# Altium PCB CoreEP4CE10-PCB1.PcbDoc
Units mil, origin at the board's own origin, x right, y up, seen from the top; angles counter-clockwise.
Board outline 6000 x 4000 mil, 2 copper layers (Top Layer, Bottom Layer); 5 components, 0 nets, 182 pads, 0 vias.
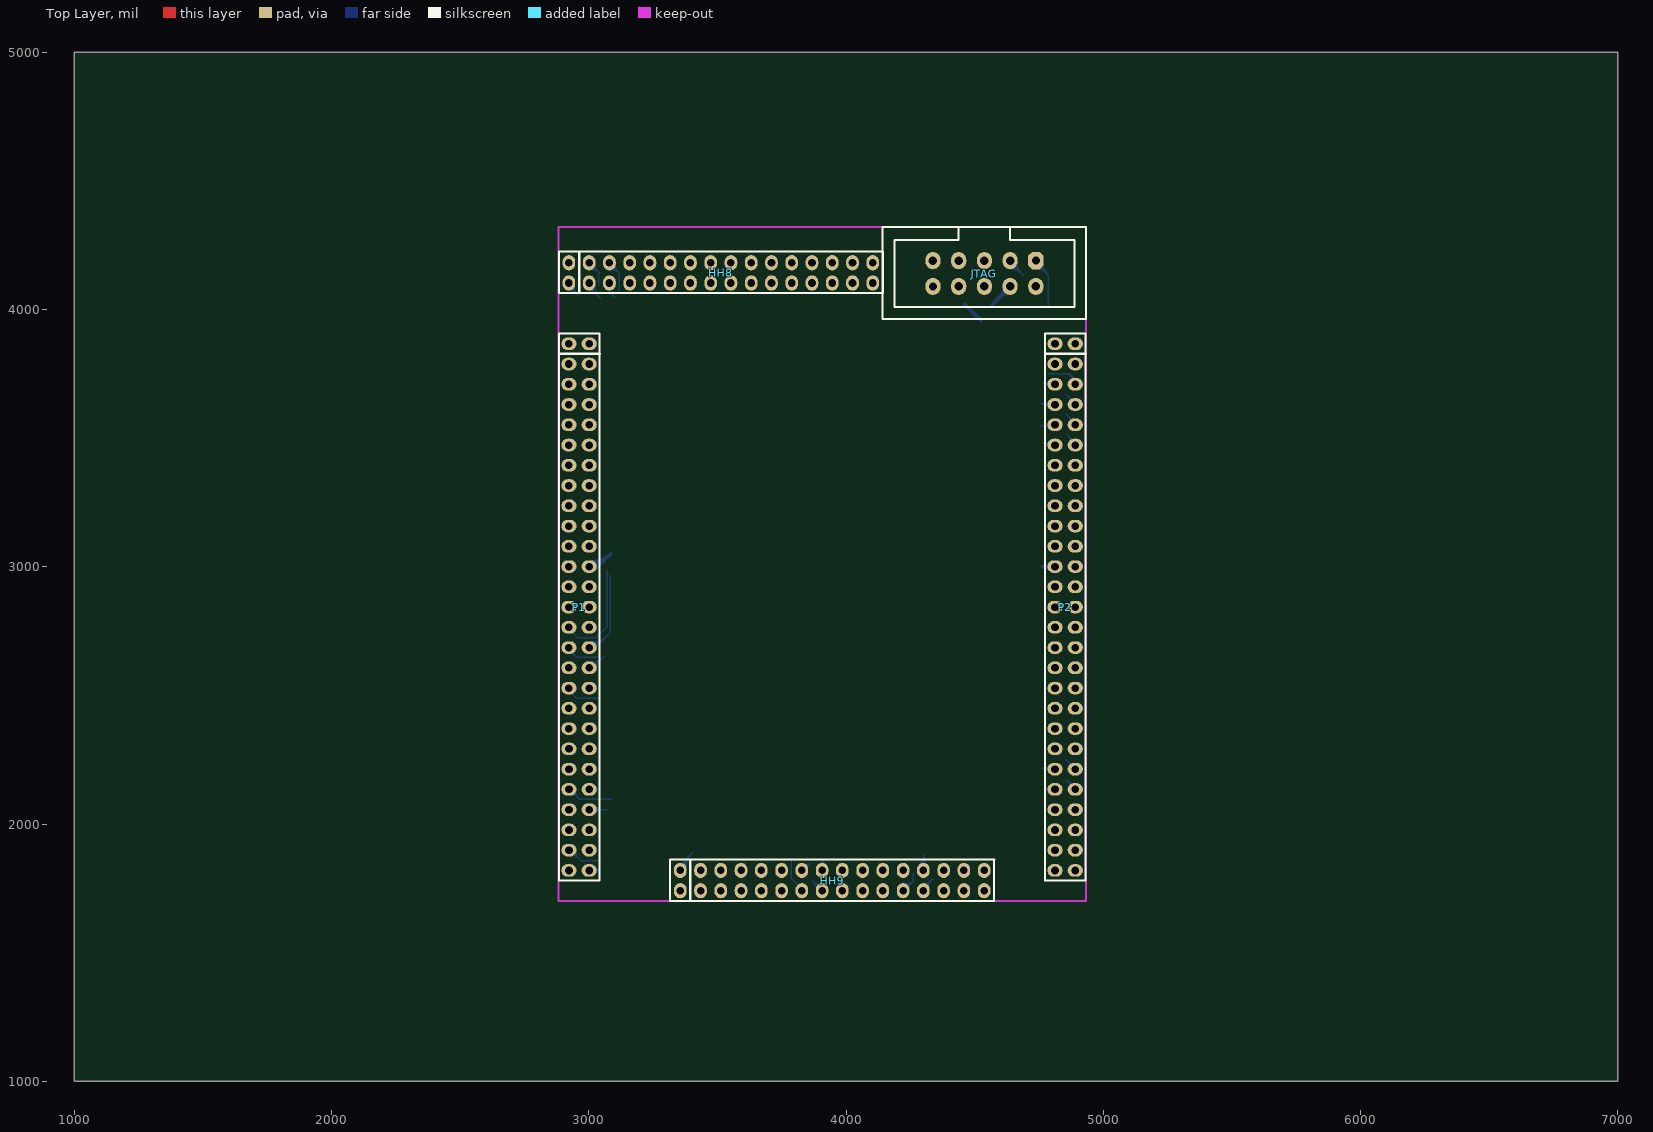
[diagram p0: Top Layer view]
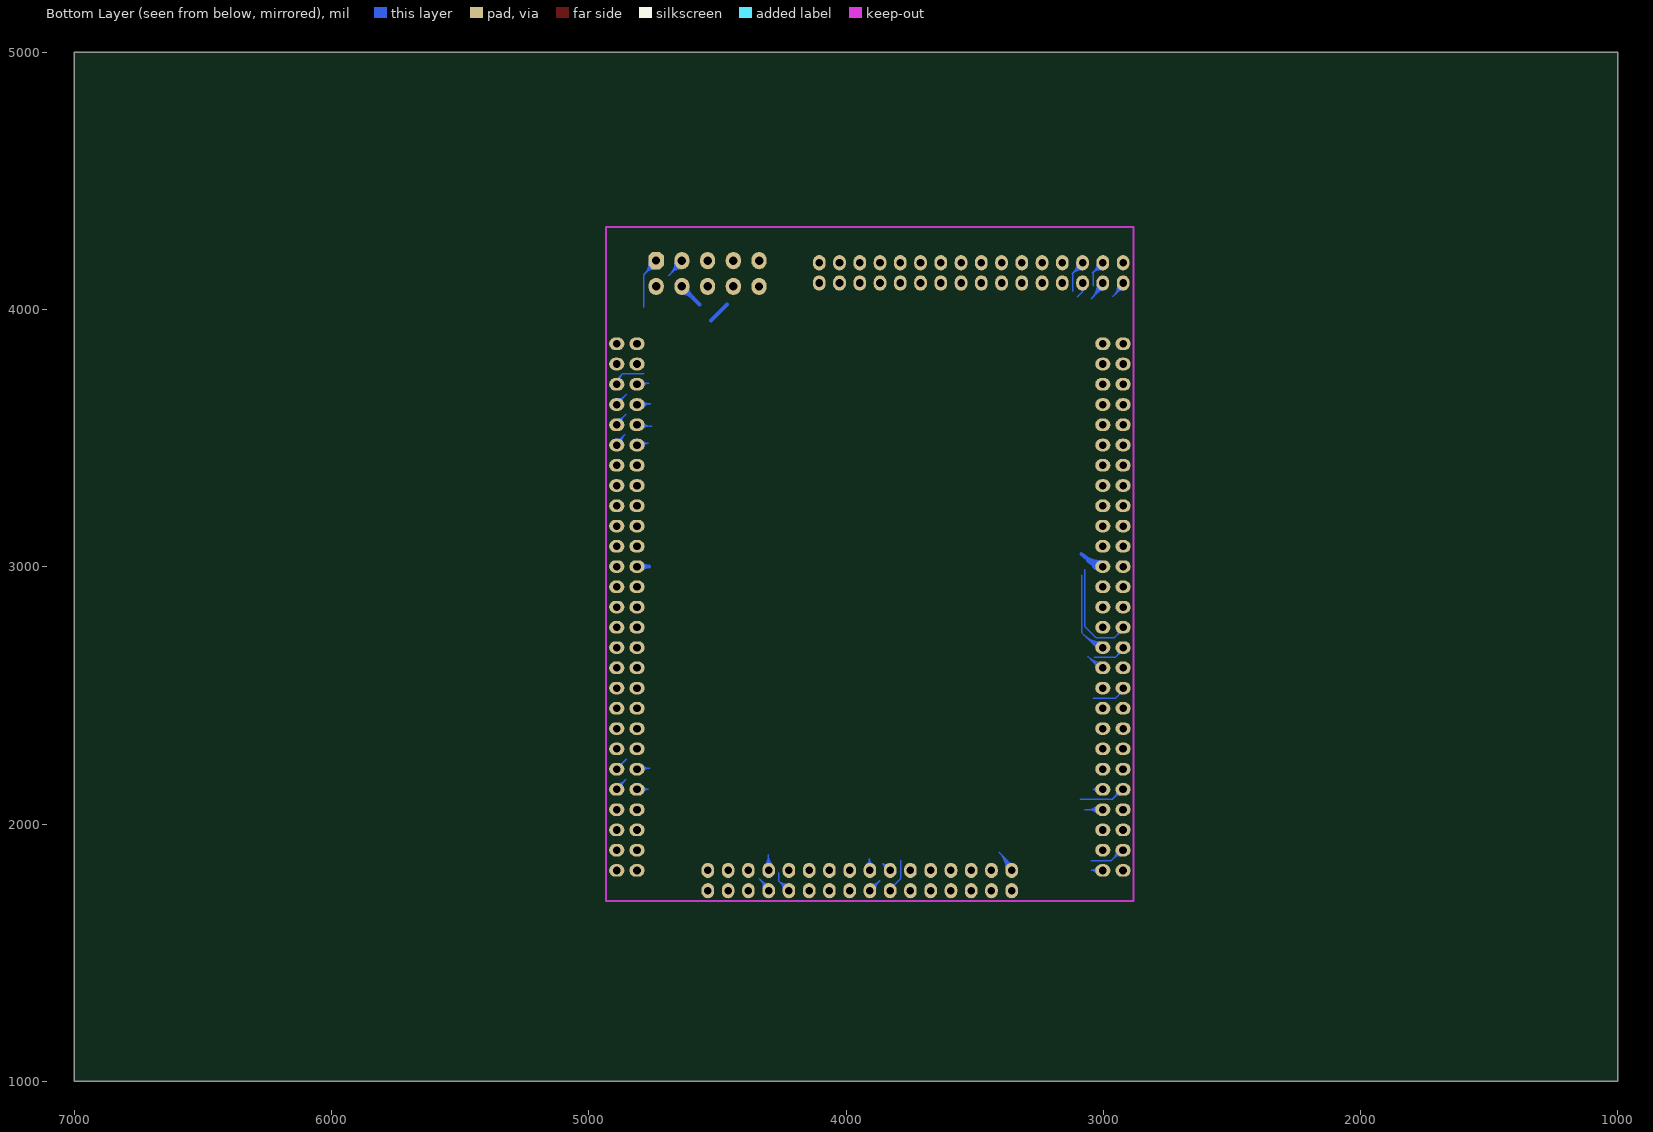
[diagram p1: Bottom Layer view, seen from below]

## Layer stack, top to bottom
Top Layer: signal copper 1.4
Dielectric: dielectric 12.6, FR-4, Dk 4.8
Bottom Layer: signal copper 1.4

## Board outline
1000,1000 7000,1000 7000,5000 1000,5000

## Design rules (kind name [scope] priority, off if disabled: settings)
Clearance [All] p1: gap=10
PolygonConnect [All] p1: connectstyle=Relief reliefconductorwidth=10 reliefentries=4 polygonreliefangle="90 Angle" airgapwidth=10
RoutingVias [All] p1: holewidth=28 width=50 viastyle="Through Hole" minholewidth=28 minwidth=50 maxholewidth=28 maxwidth=50
SolderMaskExpansion [All] p1: expansion=4
Width [All] p1: maxlimit=10 minlimit=10 preferedwidth=10
28 further rules are at their usual default settings.

## Components (designator, comment, footprint, x,y, rotation, side; value= is the part's Value field where it differs from the comment)
HH8 "Header 16X2" "Header 16X2 - 2mm" 2922.83,4103.05 r90 top locked
HH9 "Header 16X2" "Header 16X2 - 2mm" 3355.9,1740.84 r90 top locked
JTAG "JTAG" ISP_10 4738,4190 r270 top
P1 "Header 27X2" "Header 27X2 - 2mm" 2922.83,3866.83 r0 top locked
P2 "Header 27X2" "Header 27X2 - 2mm" 4812.59,3866.83 r0 top locked

## Footprints (in the part's own frame and the unit in brackets; to place one, negate y for a bottom-side part, rotate by r counter-clockwise, add the part's x,y. Pads: shape width x height; smd on the part's side, far side on the other; paste and mask are expansions set on the pad)
"Header 16X2 - 2mm" [mm]
  oval 1.5x1.25 hole 0.75: 1(0,0) 2(2,0) 3(0,-2) 4(2,-2) 5(0,-4) 6(2,-4) 7(0,-6) 8(2,-6) 9(0,-8) 10(2,-8) 11(0,-10) 12(2,-10) 13(0,-12) 14(2,-12) 15(0,-14) 16(2,-14) 17(0,-16) 18(2,-16) 19(0,-18) 20(2,-18) 21(0,-20) 22(2,-20) 23(0,-22) 24(2,-22) 25(0,-24) 26(2,-24) 27(0,-26) 28(2,-26) 29(0,-28) 30(2,-28) 31(0,-30) 32(2,-30)
  silkscreen extent -1,-31 3.1,1
"Header 27X2 - 2mm" [mm]
  oval 1.5x1.25 hole 0.75: 1(0,0) 2(2,0) 3(0,-2) 4(2,-2) 5(0,-4) 6(2,-4) 7(0,-6) 8(2,-6) 9(0,-8) 10(2,-8) 11(0,-10) 12(2,-10) 13(0,-12) 14(2,-12) 15(0,-14) 16(2,-14) 17(0,-16) 18(2,-16) 19(0,-18) 20(2,-18) 21(0,-20) 22(2,-20) 23(0,-22) 24(2,-22) 25(0,-24) 26(2,-24) 27(0,-26) 28(2,-26) 29(0,-28) 30(2,-28) 31(0,-30) 32(2,-30) 33(0,-32) 34(2,-32) 35(0,-34) 36(2,-34) 37(0,-36) 38(2,-36) 39(0,-38) 40(2,-38)
  oval 1.5x1.25 hole 0.762: 41(0,-40) 42(2,-40) 43(0,-42) 44(2,-42) 45(0,-44) 46(2,-44) 47(0,-46) 48(2,-46) 49(0,-48) 50(2,-48) 51(0,-50) 52(2,-50) 53(0,-52) 54(2,-52)
  silkscreen extent -1,-53.01 3.05,1
ISP_10 [mm]
  oct 1.7x1.5 hole 0.8: 1(0,0)
  oval 1.7x1.5 hole 0.85: 2(2.54,0) 3(0,-2.54) 4(2.54,-2.54) 5(0,-5.08) 6(2.54,-5.08) 7(0,-7.62) 8(2.54,-7.62) 9(0,-10.16)
  oval 1.7x1.5 hole 0.8: 10(2.54,-10.16)
  silkscreen extent -3.3,-15.12 5.75,4.95

## Part data
HH8 HH9: "Header, 16-Pin, Dual row"

## Nets (pads, with @x,y where several pads share a name; then routed paths per layer and width w, separated by ;. In a path a pad name is that pad's centre, name@x,y a point inside that pad or via, vN(x,y) a via of type N, cw(c..) or ccw(c..) an arc to the next point about the centre after c; other vN are vias at no path point)
pads on no net: HH8.1 HH8.2 HH8.3 HH8.4 HH8.5 HH8.6 HH8.7 HH8.8 HH8.9 HH8.10 HH8.11 HH8.12 HH8.13 HH8.14 HH8.15 HH8.16 HH8.17 HH8.18 HH8.19 HH8.20 HH8.21 HH8.22 HH8.23 HH8.24 HH8.25 HH8.26 HH8.27 HH8.28 HH8.29 HH8.30 HH8.31 HH8.32 HH9.1 HH9.2 HH9.3 HH9.4 HH9.5 HH9.6 HH9.7 HH9.8 HH9.9 HH9.10 HH9.11 HH9.12 HH9.13 HH9.14 HH9.15 HH9.16 HH9.17 HH9.18 HH9.19 HH9.20 HH9.21 HH9.22 HH9.23 HH9.24 HH9.25 HH9.26 HH9.27 HH9.28 HH9.29 HH9.30 HH9.31 HH9.32 JTAG.1 JTAG.2 JTAG.3 JTAG.4 JTAG.5 JTAG.6 JTAG.7 JTAG.8 JTAG.9 JTAG.10 P1.1 P1.2 P1.3 P1.4 P1.5 P1.6 P1.7 P1.8 P1.9 P1.10 P1.11 P1.12 P1.13 P1.14 P1.15 P1.16 P1.17 P1.18 P1.19 P1.20 P1.21 P1.22 P1.23 P1.24 P1.25 P1.26 P1.27 P1.28 P1.29 P1.30 P1.31 P1.32 P1.33 P1.34 P1.35 P1.36 P1.37 P1.38 P1.39 P1.40 P1.41 P1.42 P1.43 P1.44 P1.45 P1.46 P1.47 P1.48 P1.49 P1.50 P1.51 P1.52 P1.53 P1.54 P2.1 P2.2 P2.3 P2.4 P2.5 P2.6 P2.7 P2.8 P2.9 P2.10 P2.11 P2.12 P2.13 P2.14 P2.15 P2.16 P2.17 P2.18 P2.19 P2.20 P2.21 P2.22 P2.23 P2.24 P2.25 P2.26 P2.27 P2.28 P2.29 P2.30 P2.31 P2.32 P2.33 P2.34 P2.35 P2.36 P2.37 P2.38 P2.39 P2.40 P2.41 P2.42 P2.43 P2.44 P2.45 P2.46 P2.47 P2.48 P2.49 P2.50 P2.51 P2.52 P2.53 P2.54
copper on no net: | length 8150.4
  Bottom Layer w6: 2920,1903 2924,1903 2958.5,1868.5 ; 2921,2531 2921,2520 2949.5,2491.5 ; 2922.83,4076.52 cw(c2922.83,4043.56) 2946.13,4066.87 ; 2922.83,4082.52 cw(c2922.83,4064.04) 2935.89,4077.11 ; 2923,2765 2923,2758 2950.5,2730.5 ; 2924,2133 2928,2133 2955.5,2105.5 ; 2924,2685 2924,2677 2952,2649 ; 2924,4102 2924,4089 2962,4051 2945.5,4067.5 ; 2927.75,2506.64 cw(c2927.75,2490.67) 2939.04,2501.96 ; 2927.75,2664.12 cw(c2927.75,2642.06) 2943.34,2657.66 ; 2928.15,2742.86 cw(c2928.58,2719.79) 2944.89,2736.11 cw(c2952.45,2743.66) 2944.28,2750.55 ; 2930.25,1882.92 cw(c2934.02,1859.67) 2950.68,1876.32 ; 2930.62,2119.2 cw(c2933.96,2101.35) 2946.81,2114.19 ; 2931.21,1877 cw(c2936.34,1845.41) 2958.96,1868.04 cw(c2983.01,1892.08) 2949.22,1895.9 ; 2931.72,2113.31 cw(c2936.5,2087.79) 2954.85,2106.15 cw(c2971.72,2123.01) 2948.65,2129.06 ; 2932.35,4096.9 ccw(c2961.64,4093.12) 2940.76,4072.24 ; 2938.3,4096.13 ccw(c2976.93,4091.15) 2949.39,4063.61 ; 2939.69,2754.41 ccw(c2947.43,2747.89) 2940.27,2740.73 ; 2940.02,2676.08 ccw(c2949.55,2668.59) 2940.98,2660.02 ; 2942.84,2130.58 ccw(c2960,2126.08) 2947.46,2113.54 ; 2943.26,1896.57 ccw(c2967.18,1893.87) 2950.16,1876.84 ; 2944.25,4095.36 ccw(c2992.22,4089.17) 2958.02,4054.98 ; 2944.74,2672.38 ccw(c2954.91,2664.38) 2945.76,2655.24 ; 2945.91,2735.09 2950.5,2730.5 ; 2946,2495 2949.5,2491.5 ; 2946,2655 2952,2649 ; 2951,2110 2955.5,2105.5 ; 2954,1873 2958.5,1868.5 ; 2997,1820 3046,1820 ; 2998,2058 3001,2055 3066,2055 ; 3000,2450 3001,2451 3027,2451 ; 3000,4181 3003,4181 3039,4145 3039,4091.91 ; 3001.57,2134.54 3039.54,2134.54 ; 3001.57,2606.98 3015.98,2606.98 ; 3001.57,2685.72 3025.72,2685.72 3083,2743 3083,2966 3083,2967.88 ; 3001.57,4076.52 cw(c3001.57,4052.59) 3018.49,4069.51 ; 3002,2607 3003,2608 ; 3002,2687 3003,2688 ; 3002.66,4167.32 cw(c3005.64,4141.25) 3024.2,4159.8 ; 3003,4085 3003,4102 ; 3003.34,4161.36 cw(c3007.44,4125.46) 3032.99,4151.01 ; 3004.02,4155.4 cw(c3009.24,4109.68) 3041.78,4142.22 ; 3005.17,4098.13 ccw(c3042.11,4098.13) 3015.99,4072.01 ; 3006.49,2610.59 ccw(c3006.49,2642.22) 3028.85,2619.85 ; 3006.49,2616.59 ccw(c3006.49,2662.71) 3039.1,2630.1 ; 3006.49,2622.59 ccw(c3006.49,2683.19) 3049.34,2640.34 ; 3006.49,2628.59 ccw(c3006.49,2703.68) 3059.58,2650.58 ; 3006.49,2683.33 ccw(c3006.49,2723.99) 3035.24,2695.24 ; 3006.49,2689.33 ccw(c3006.49,2744.48) 3045.48,2705.48 ; 3006.49,2695.33 ccw(c3006.49,2764.96) 3055.72,2715.72 ; 3006.49,2701.33 ccw(c3006.49,2785.45) 3065.97,2725.97 ; 3006.49,2707.33 ccw(c3006.49,2805.93) 3076.21,2736.21 ; 3011.17,4098.13 ccw(c3062.6,4098.13) 3026.24,4061.76 ; 3013.28,2062.6 ccw(c3031.62,2080.93) 3031.62,2055 ; 3017.17,4098.13 ccw(c3083.09,4098.13) 3036.48,4051.52 ; 3017.17,4176.87 ccw(c3041.42,4176.87) 3024.27,4159.73 ; 3017.52,2044.77 cw(c3042.23,2020.07) 3042.23,2055 ; 3017.52,2066.84 ccw(c3046.1,2095.42) 3046.1,2055 ; 3019.49,1828.22 ccw(c3034.81,1838.39) 3034.81,1820 ; 3019.76,1811.38 cw(c3035.23,1801.81) 3035.23,1820 ; 3021.77,2040.53 cw(c3056.71,2005.58) 3056.71,2055 ; 3021.77,2071.08 ccw(c3060.59,2109.9) 3060.59,2055 ; 3023.17,4098.13 ccw(c3103.57,4098.13) 3046.72,4041.28 ; 3023.17,4176.87 ccw(c3061.9,4176.87) 3034.52,4149.48 ; 3024.49,1831.54 ccw(c3046,1845.82) 3046,1820 ; 3024.87,1808.22 cw(c3046,1795.15) 3046,1820 ; 3026.28,2125.87 cw(c3039.54,2120.06) 3039.54,2134.54 ; 3026.28,2143.21 ccw(c3039.54,2149.02) 3039.54,2134.54 ; 3028.09,2606.98 cw(c3057.33,2606.98) 3036.66,2627.66 ; 3035,2649 2952,2649 ; 3039,2488 2953,2488 2949.5,2491.5 ; 3043,2055 3066,2055 ; 3047,1858 2969,1858 2958.5,1868.5 ; 3071,2055 3066,2055 ; 3071,2989 3071,2767 3028,2724 2957,2724 2950.5,2730.5 ; 3074.66,4077.27 cw(c3072.42,4068.99) 3081,4068.99 ; 3080.59,4167.26 cw(c3081.39,4139.9) 3100.74,4159.26 ; 3080.76,4161.27 cw(c3081.94,4120.79) 3110.58,4149.42 ; 3080.94,4155.27 cw(c3082.5,4101.68) 3120.41,4139.59 ; 3081,4106 3081,4069 ; 3084,4182 3084,4176 3119,4141 ; 3087.22,4077.66 ccw(c3090.14,4068.99) 3081,4068.99 ; 3090,2096 2965,2096 2955.5,2105.5 ; 3090.5,4059.5 3100,4050 3081,4069 ; 3095.91,4176.87 ccw(c3126.77,4176.87) 3104.95,4155.05 ; 3101.91,4176.87 ccw(c3147.26,4176.87) 3115.19,4144.81 ; 3107,4153 3119,4141 ; 3119,4072 3119,4141 ; 3353.5,1824.5 cw(c3387.31,1824.5) 3363.4,1848.4 ; 3355.9,1846.11 ccw(c3355.9,1858.69) 3364.79,1849.79 ; 3357,1822 3357,1842 ; 3359.5,1824.5 cw(c3407.79,1824.5) 3373.65,1858.65 ; 3365.5,1824.5 cw(c3428.28,1824.5) 3383.89,1868.89 ; 3371.5,1824.5 cw(c3448.76,1824.5) 3394.13,1879.13 ; 3377.5,1824.5 cw(c3469.25,1824.5) 3404.38,1889.38 ; 3787.5,1857.5 3788,1857 3788,1787 3802.5,1772.5 ; 3805,1770 3802.5,1772.5 ; 3828,1743 3828,1747 3802.5,1772.5 ; 3829,1817 3829,1818 ; 3829,1819.58 3829,1818 ; 3835.88,1838.17 ccw(c3842.16,1849.55) 3851.36,1840.36 ; 3838.78,1843.42 ccw(c3846.17,1856.82) 3857,1846 ; 3849.86,1826.39 cw(c3874.46,1828.54) 3857,1846 ; 3869,1779 3908,1740 ; 3871.42,1776.58 ccw(c3896.2,1801.35) 3902.93,1766.97 ; 3873.62,1774.38 cw(c3845,1745.76) 3885.47,1745.76 ; 3879.39,1768.61 ccw(c3898.81,1788.03) 3904.08,1761.08 ; 3883.86,1764.14 cw(c3865.49,1745.76) 3891.47,1745.76 ; 3887.36,1760.64 ccw(c3901.42,1774.7) 3905.23,1755.19 ; 3896.79,1843.5 ccw(c3885.69,1864) 3909,1864 ; 3899.65,1838.23 ccw(c3891.15,1853.93) 3909,1853.93 ; 3906,1740 3908,1740 ; 3909,1739 3908,1740 ; 3909,1819 3909,1864 ; 3909,1851.96 ccw(c3927.78,1851.96) 3916.47,1836.96 ; 3920.09,1841.76 cw(c3936.85,1864) 3909,1864 ; 4219,1740 4220.94,1741.94 ; 4222.04,1740.84 4222.1,1740.9 ; 4223,1740 4262,1779 ; 4223.54,1755.25 ccw(c4227.48,1780.19) 4245.34,1762.34 ; 4224.48,1761.18 ccw(c4229.76,1794.58) 4253.67,1770.67 ; 4225.41,1767.1 ccw(c4232.03,1808.97) 4262,1779 ; 4237.65,1745.76 cw(c4259.09,1745.76) 4243.93,1760.93 ; 4243.65,1745.76 cw(c4279.58,1745.76) 4254.17,1771.17 ; 4262,1807 4262,1810 4262,1779 ; 4285.5,1839.78 ccw(c4245.67,1879.61) 4302,1879.61 ; 4289.74,1835.54 ccw(c4260.16,1865.13) 4302,1865.13 ; 4293.99,1831.3 ccw(c4274.64,1850.64) 4302,1850.64 ; 4300.78,1740.84 4300.78,1750.78 4331,1781 ; 4300.78,1761.37 ccw(c4300.78,1786.93) 4318.86,1768.86 ; 4300.78,1767.37 ccw(c4300.78,1807.42) 4329.1,1779.1 ; 4302,1859.23 ccw(c4335.51,1859.23) 4311.82,1835.54 ; 4302,1873.72 ccw(c4350,1873.72) 4316.06,1839.78 ; 4316.04,1749.02 cw(c4341.86,1754.53) 4323.19,1773.19 ; 4321.91,1750.27 cw(c4354.72,1757.27) 4331,1781 ; 4322,1772 4331,1781 ; 4338,1788 4331,1781 ; 4638,4159.54 cw(c4638,4102.89) 4678.06,4142.94 ; 4638,4165.54 cw(c4638,4123.37) 4667.81,4153.19 ; 4638,4171.54 cw(c4638,4143.86) 4657.57,4163.43 ; 4639,4182 4689,4132 ; 4652.53,4186.06 ccw(c4694.99,4186.06) 4664.97,4156.03 ; 4658.53,4186.06 ccw(c4715.48,4186.06) 4675.21,4145.79 ; 4664.53,4186.06 ccw(c4735.97,4186.06) 4685.45,4135.55 ; 4738,4159.54 cw(c4738,4102.89) 4778.06,4142.94 ; 4738,4165.54 cw(c4738,4123.37) 4767.81,4153.19 ; 4738,4171.54 cw(c4738,4143.86) 4757.57,4163.43 ; 4739,4182 4786,4135 4786,4008 ; 4752.53,4185.85 ccw(c4793.05,4185.27) 4764.39,4156.61 ; 4755.83,3546 ccw(c4755.83,3603.7) 4796.63,3562.9 ; 4758.53,4185.77 ccw(c4812.84,4184.98) 4774.43,4146.57 ; 4761.29,3633 ccw(c4761.29,3676.99) 4792.39,3645.88 ; 4762.14,2217 cw(c4762.14,2169.31) 4796.44,2202.44 ; 4764.48,2217 ccw(c4764.48,2256.47) 4792.39,2228.56 ; 4764.52,4185.68 ccw(c4832.63,4184.69) 4784.47,4136.53 ; 4765.94,3713 4771,3713 ; 4769.67,3546 cw(c4769.67,3513.87) 4792.39,3536.59 ; 4770.32,3546 ccw(c4770.32,3589.22) 4800.88,3558.66 ; 4771,3633 4760,3633 ; 4771.92,3633 cw(c4771.92,3604.1) 4795.13,3621.31 ; 4774,2135 4769,2135 ; 4774,3713 4771,3713 ; 4774.06,3481 4769,3481 ; 4774.52,3481 ccw(c4774.52,3506.28) 4792.39,3488.4 ; 4775.77,3633 ccw(c4775.77,3662.5) 4796.63,3641.64 ; 4776.28,2217 cw(c4776.28,2182.96) 4800.76,2206.61 ; 4776.87,3481 cw(c4776.87,3464.67) 4792.62,3468.99 ; 4778.96,2217 ccw(c4778.96,2241.99) 4796.63,2224.32 ; 4779.52,2135 cw(c4779.52,2117.9) 4794.23,2126.6 ; 4779.71,3713 cw(c4779.71,3698.68) 4793.09,3703.79 ; 4779.97,2135 ccw(c4779.97,2152.29) 4794.53,2142.96 ; 4783.26,3713 ccw(c4783.26,3728.3) 4795.34,3718.92 ; 4786.83,3467.4 ccw(c4769,3462.51) 4769,3481 ; 4786.97,3751 4867.95,3751 4891,3727.95 4891,3710 ; 4787.48,3701.65 ccw(c4771,3695.36) 4771,3713 ; 4789.07,2123.55 ccw(c4769,2111.69) 4769,2135 ; 4789.48,2146.2 cw(c4769,2159.32) 4769,2135 ; 4790.31,3617.74 ccw(c4760,3595.27) 4760,3633 ; 4790.6,3722.6 cw(c4771,3737.82) 4771,3713 ; 4803,3546 4810,3553 ; 4808,3789 4813,3789 ; 4810,3713 4771,3713 ; 4812,2217 4813,2216 ; 4813,3475 4807,3481 4769,3481 ; 4814,2136 4813,2135 4769,2135 ; 4814,3634 4813,3633 4760,3633 ; 4854,2252 4866,2240 4893,2213 ; 4854,3670 4862.5,3661.5 ; 4856,3592 4861,3587 ; 4856.12,2173 4892.12,2137 4893,2137 ; 4860.47,2168.66 cw(c4834.12,2142.32) 4870.97,2136.84 ; 4861,3513 4892,3482 4892,3477 ; 4861.28,3512.72 cw(c4834.53,3485.96) 4871.26,3476.87 ; 4861.45,3662.55 ccw(c4886.41,3687.51) 4886.41,3652.21 ; 4863.48,2165.65 ccw(c4886.41,2188.58) 4886.41,2156.15 ; 4863.54,3584.46 cw(c4842.44,3563.36) 4871.31,3555.81 ; 4865,3659 4862.5,3661.5 ; 4865.99,3658.01 cw(c4850.09,3642.1) 4871.53,3635.32 ; 4866.13,3581.87 ccw(c4886.41,3602.16) 4886.41,3573.47 ; 4867.51,3580.49 4861,3587 ; 4868.8,3505.2 cw(c4846.58,3482.98) 4877.08,3475.43 ; 4868.89,2160.23 cw(c4848.79,2140.13) 4876.91,2135.96 ; 4869.51,3749.45 cw(c4845.02,3724.96) 4877.42,3712.74 ; 4870.94,3577.06 cw(c4854.17,3560.29) 4877.12,3554.3 ; 4871.69,3652.31 ccw(c4886.41,3667.03) 4886.41,3646.21 ; 4874.22,3499.78 ccw(c4886.41,3511.97) 4886.41,3494.73 ; 4876.08,3742.87 cw(c4854.57,3721.36) 4883.04,3710.62 ; 4876.31,3497.69 cw(c4858.63,3480) 4882.91,3473.99 ; 4882.66,3736.3 cw(c4864.11,3717.76) 4888.65,3708.5 ; 4890,3630 4890,3634 4862.5,3661.5 ; 4892,3552 4892,3556 4861,3587 ; 3829,1818 3857,1846
  Bottom Layer w15: 3001.57,3000.68 3035.68,3000.68 ; 3006.49,2987.79 ccw(c3006.49,3027.15) 3034.32,2999.32 ; 3006.49,3002.79 ccw(c3006.49,3078.36) 3059.93,3024.93 ; 3006.49,3017.79 ccw(c3006.49,3129.58) 3085.53,3050.53 ; 3021.41,2992.32 cw(c3035.68,2984.32) 3035.68,3000.68 ; 3021.41,3009.05 ccw(c3035.68,3017.05) 3035.68,3000.68 ; 4462,4020 4525,3957 ; 4569,4020 4642,4093 ; 4595.38,4046.38 cw(c4638,4003.77) 4638,4064.04 ; 4602.47,4053.47 ccw(c4569.88,4086.06) 4615.97,4086.06 ; 4795.57,2988.59 ccw(c4766.37,2959.39) 4766.37,3000.68 ccw(c4766.37,3041.98) 4795.57,3012.78

## Keep-outs
Keep-Out Layer:
  lines w8: 2883,1701 2883,4320 4933,4320 4933,1701 2883,1701